# Altium PCB SC8808_V4.PcbDoc (part 1 of 2)
Units mm, origin at the board's own origin, x right, y up, seen from the top; angles counter-clockwise.
Board outline 67.41 x 100 mm, 4 copper layers (Top Layer, SIGNAL, POWER, Bottom Layer), stack 1.439 mm thick; 136 components, 98 nets, 352 pads, 959 vias.
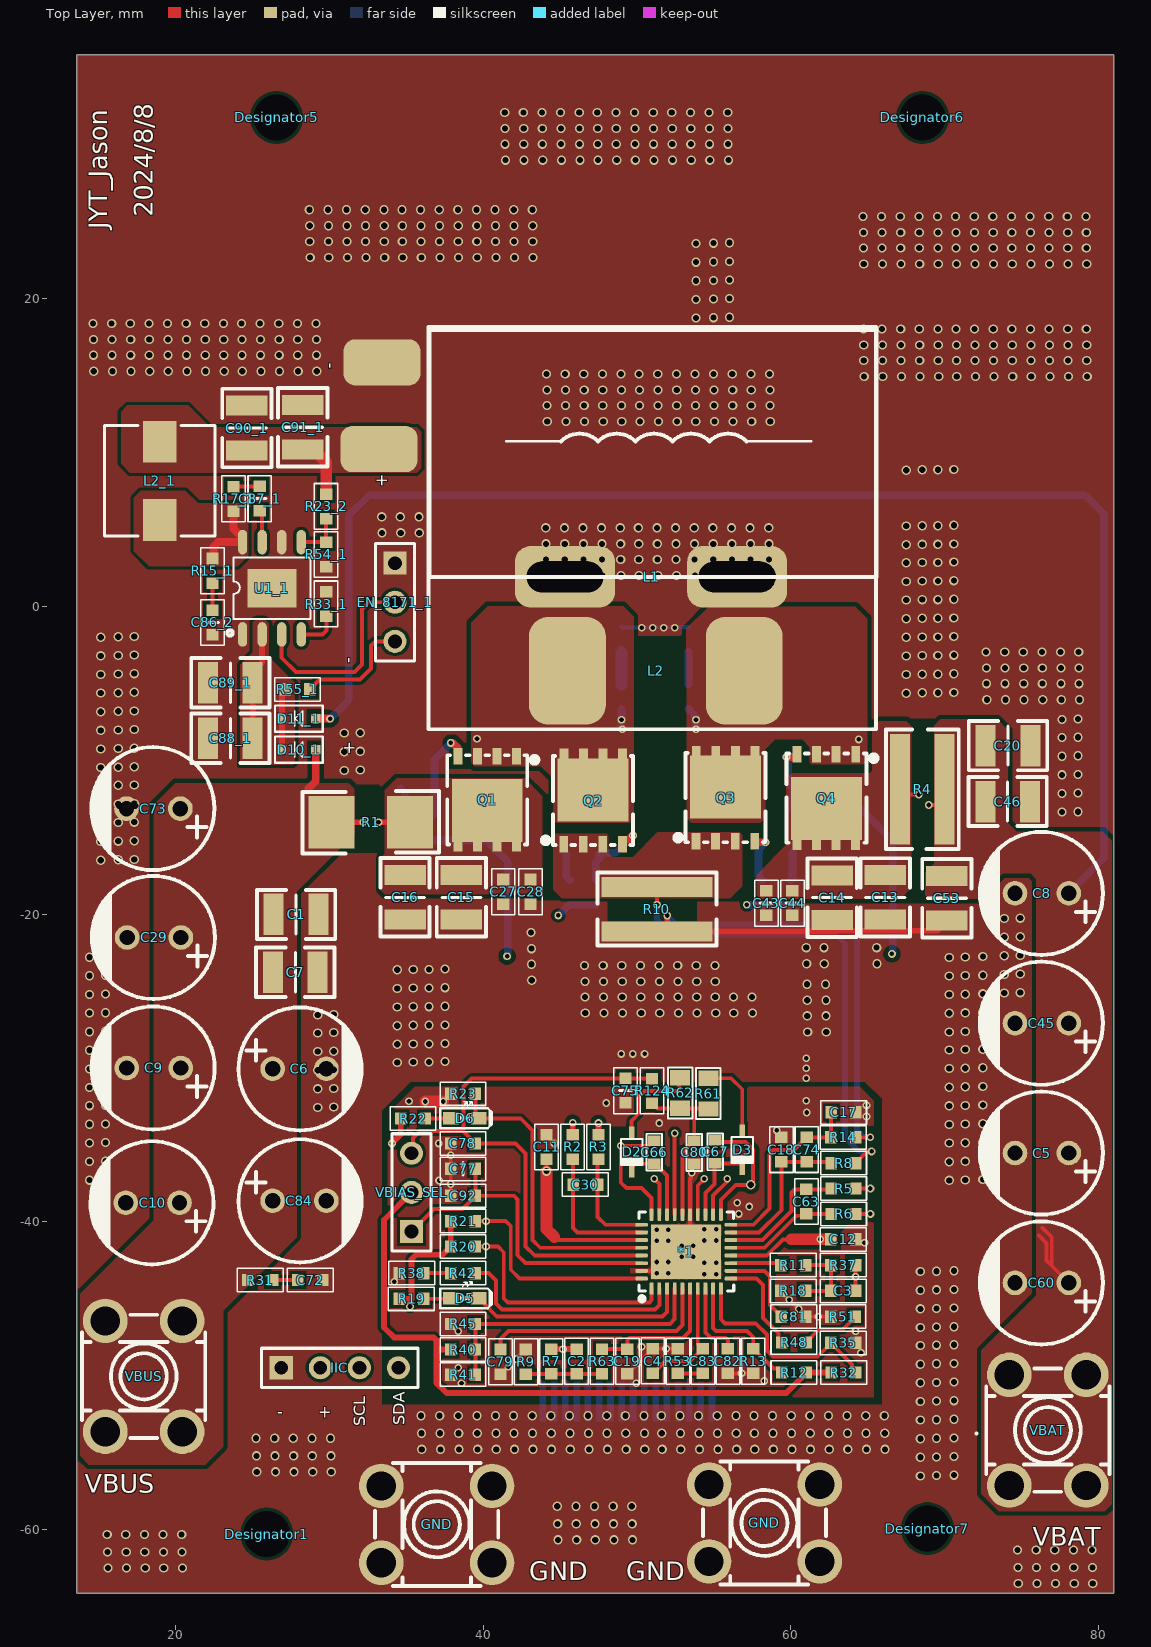
[diagram p0: Top Layer view]
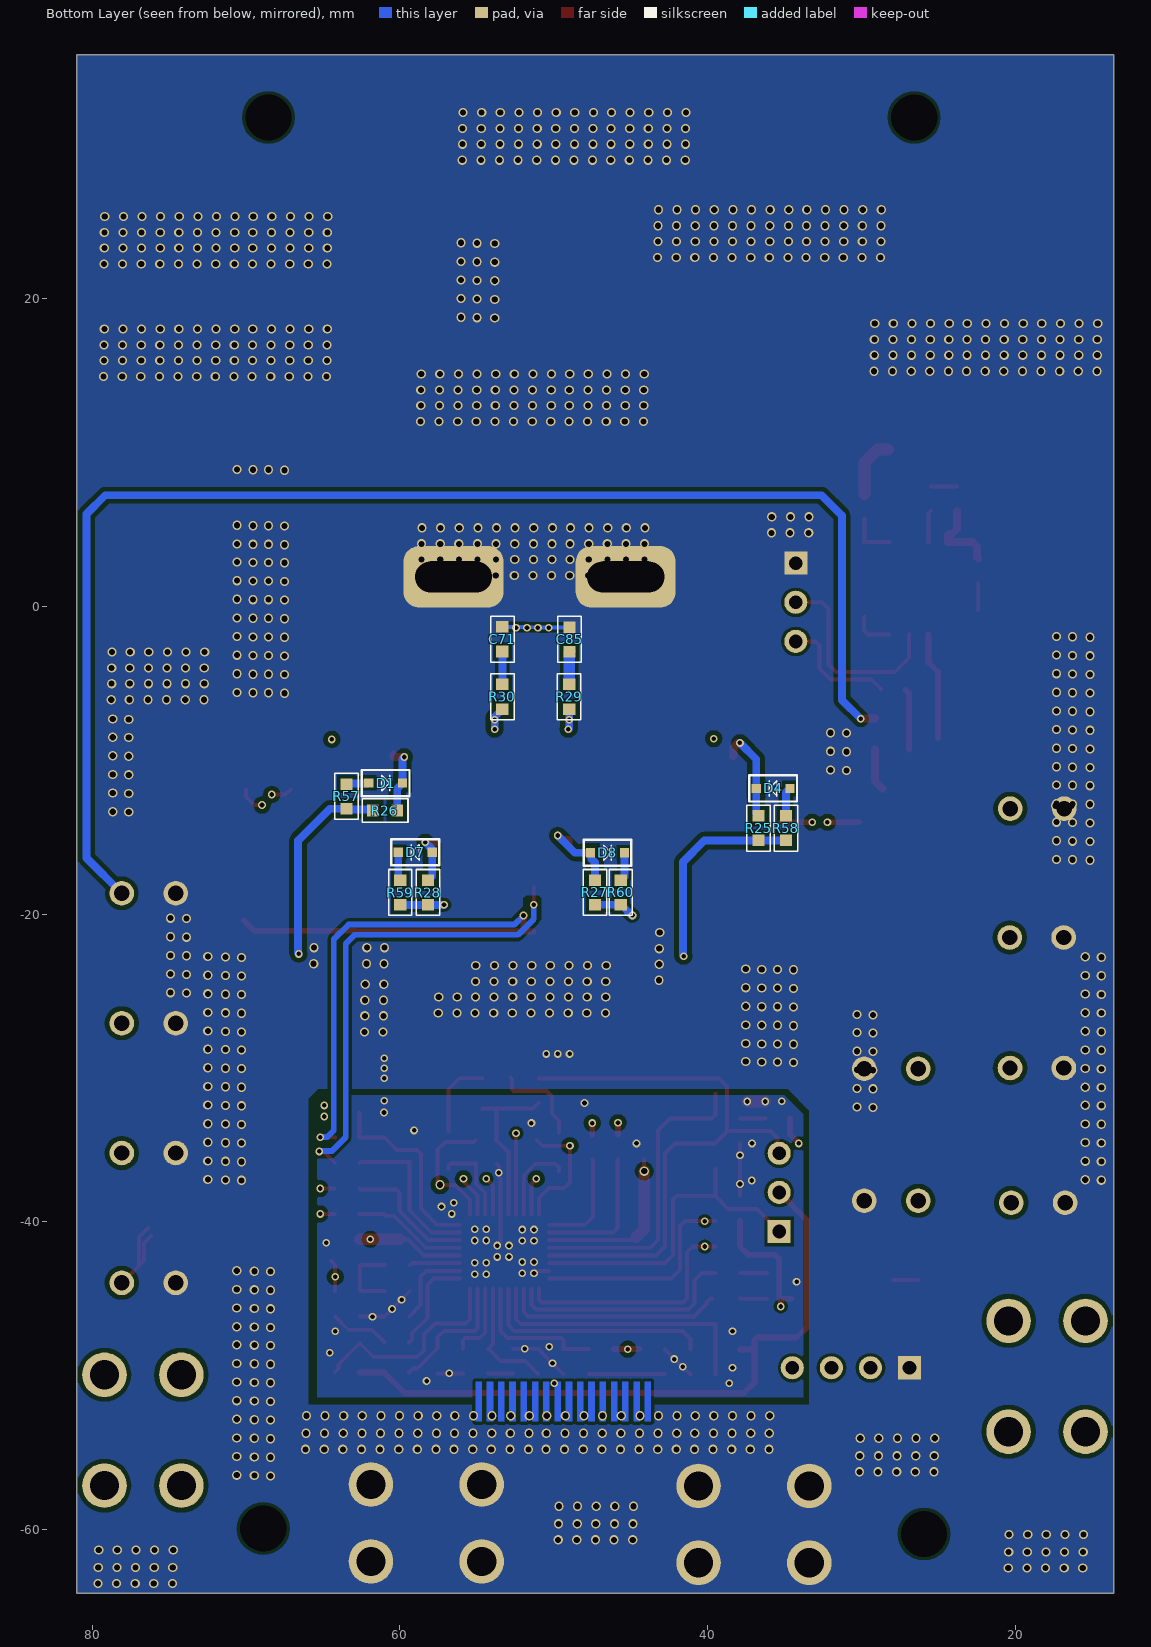
[diagram p1: Bottom Layer view, seen from below]
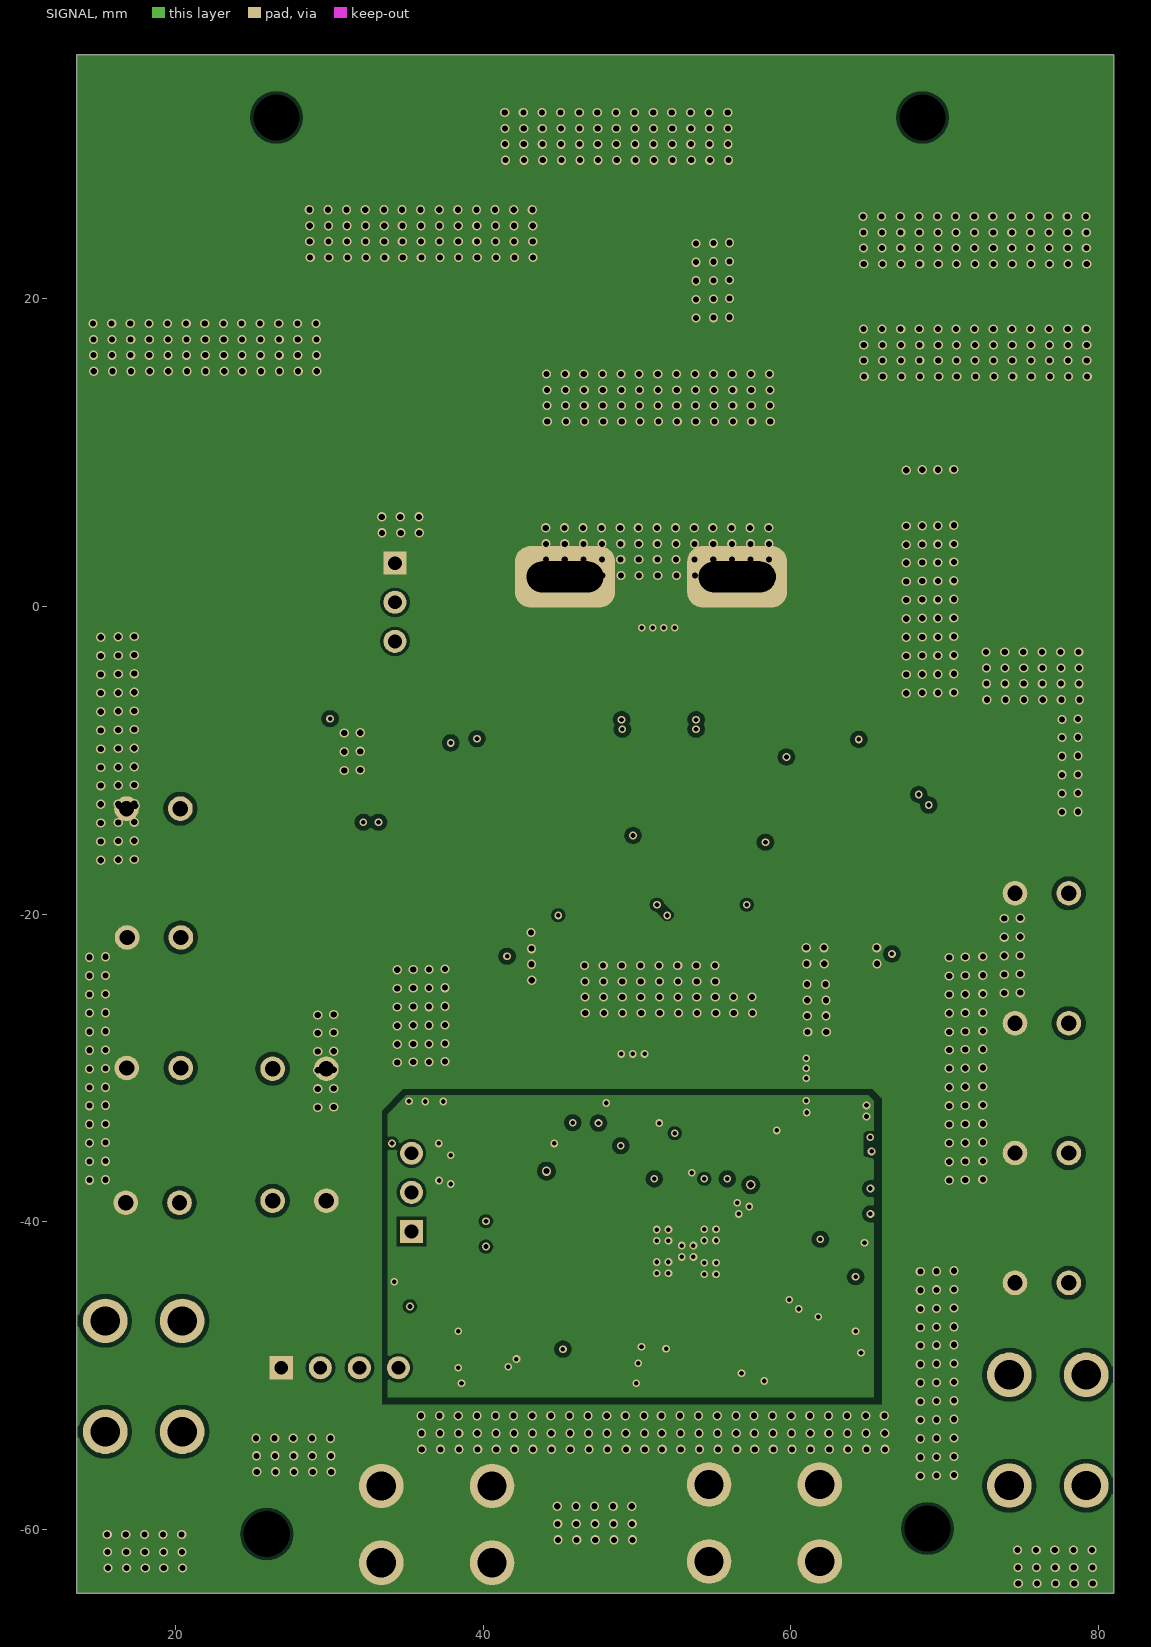
[diagram p2: SIGNAL]
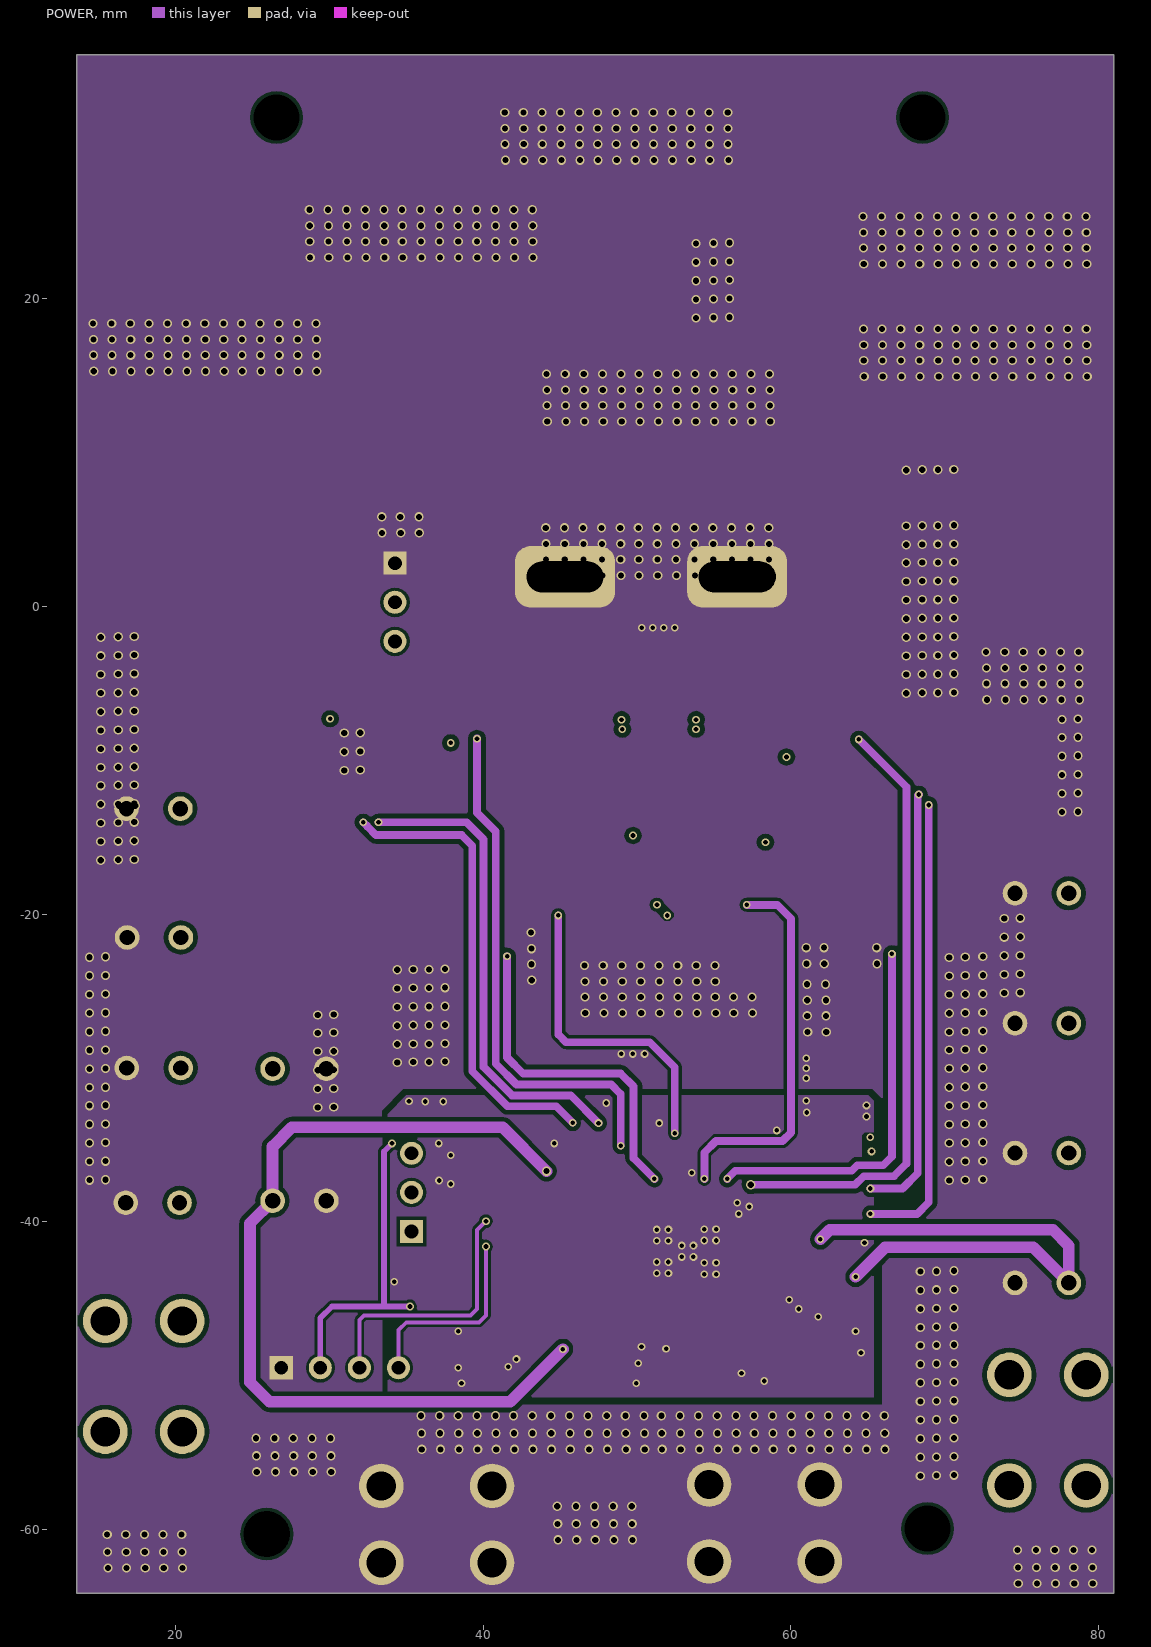
[diagram p3: POWER]

## Layer stack, top to bottom
Top Solder: solder mask 0.0254, SM-001, Dk 4
Top Layer: signal copper 0.07
Dielectric 4: prepreg 0.1295, PP-017, Dk 4.3
Dielectric 2: prepreg 0.1295, PP-017, Dk 4.3
SIGNAL: signal copper 0.035
Dielectric 1: core 0.7112, Core-039, Dk 4.8
POWER: signal copper 0.035
Dielectric 3: prepreg 0.1295, PP-017, Dk 4.3
Dielectric 5: prepreg 0.1295, PP-017, Dk 4.3
Bottom Layer: signal copper 0.07
Bottom Solder: solder mask 0.0254, SM-001, Dk 4

## Board outline
13.589,-64.135 13.589,35.865 81.001,35.865 81.001,-64.135

## Design rules (kind name [scope] priority, off if disabled: settings)
Clearance Polygon_HV_NET [InPolygon vs InNetClass('HV_NET')] p1: gap=0.3 ignorepadtopadclearanceinfootprint=FALSE
Clearance Polygon_PWR [InPolygon vs InNetClass('PWR_NOT_GND')] p2: gap=0.2 ignorepadtopadclearanceinfootprint=FALSE
Clearance [All] p3: gap=0.2 ignorepadtopadclearanceinfootprint=FALSE
HoleSize [All] p1: absolutevalues=TRUE maxlimit=10 minlimit=0.025 maxpercent=80.000 minpercent=20.000
MinimumSolderMaskSliver [All] p1: minsoldermaskwidth=0.152
PlaneConnect PlaneConnect_power [InNetClass('PWR_IN_OUT')] p1: planeconnectstyle=Direct reliefexpansion=0.508 reliefentries=4 reliefconductorwidth=0.254 reliefairgap=0.254
PlaneConnect PlaneConnect_1 [All] p2: planeconnectstyle=Relief reliefexpansion=0.508 reliefentries=4 reliefconductorwidth=0.254 reliefairgap=0.254
PolygonConnect PolygonConnect_power [InNetClass('PWR_IN_OUT')] p1: connectstyle=Direct reliefconductorwidth=0.254 reliefentries=4 polygonreliefangle="90 Angle" airgapwidth=0.254
PolygonConnect PolygonConnect_1 [All] p2: connectstyle=Direct reliefconductorwidth=0.254 reliefentries=4 polygonreliefangle="90 Angle" airgapwidth=0.254
RoutingLayers [InNet('GND')] p1: top layer_v5=FALSE mid layer 1_v5=TRUE mid layer 2_v5=TRUE bottom layer_v5=FALSE
RoutingVias [All] p1: holewidth=0.3 width=0.5 viastyle="Through Hole" minholewidth=0.3 minwidth=0.5 maxholewidth=0.3 maxwidth=1.27
SolderMaskExpansion [All] p1: expansion=0.102 istentingtop=FALSE
Width [All] p1: maxlimit=1.27 minlimit=0.2 preferedwidth=0.762
26 further rules are at their usual default settings.

## Classes and differential pairs
net class HV_NET: BT EN HD1 HD2 Net*1_21 Net*1_26 NetEN_8171_3 SNS1N SNS1P SNS2N SNS2P snub_vout SW SW1 SW2 VBAT VBUS Vg_Q1 Vg_Q2 Vg_Q3 Vg_Q4 VIN_8171 VMID
net class PWR_NOT_GND: EN NetEN_8171_3 snub_gnd snub_vout SW1 SW2 VBAT VBUS VIN_8171 VMID
net class PWR_IN_OUT: GND snub_gnd snub_vout SW SW1 SW2 VBAT VBUS VIN_8171 VMID
component class "SC8808_EVM _V04": C1 C2 C4 C7 C11 C12 C13 C14 C15 C16 C17 C18 C19 C27 C28 C30 C43 C44 C46 C53 C63 C66 C67 C71 C72 C74 C75 C77 C78 C79 C80 C81 C82 C83 C85 C92 D1 D2 D3 D4 D5 D6 D7 D8 IIC Q1 Q2 Q3 R1 R2 R3 R4 R5 R6 R7 R8 R9 R10 R11 R12 R13 R14 R18 R19 R20 R21 R22 R25 R26 R27 R28 R29 R30 R31 R32 R35 R38 R40 R41 R42 R45 R48 R51 R53 R57 R58 R59 R60 R61 R62 R63

## Components (designator, comment, footprint, x,y, rotation, side; value= is the part's Value field where it differs from the comment)
*1 "SC8808" QFN-36-5X6 50.952,-44.336 r90 top
C1 "4.7uF/100V" C_1210 26.439,-20.015 r0 top
C2 "1nF/100V" R_0603 46.076,-48.222 r270 top
C3 "NC" R_0603 62.56,-44.488 r0 top
C4 "NC" R_0603 51.029,-48.196 r270 top
C5 "CAP-TH_BD8.0-P3.50-D0.6-FD" CAP-TH_BD8.0-P3.50-D0.6-FD 76.327,-35.526 r180 top
C6 "CAP-TH_BD8.0-P3.50-D0.6-FD" CAP-TH_BD8.0-P3.50-D0.6-FD 28.06,-30.052 r0 top
C7 "4.7uF/100V" C_1210 29.185,-23.774 r180 top
C8 "CAP-TH_BD8.0-P3.50-D0.6-FD" CAP-TH_BD8.0-P3.50-D0.6-FD 76.327,-18.644 r180 top
C9 "CAP-TH_BD8.0-P3.50-D0.6-FD" CAP-TH_BD8.0-P3.50-D0.6-FD 18.586,-29.997 r180 top
C10 "CAP-TH_BD8.0-P3.50-D0.6-FD" CAP-TH_BD8.0-P3.50-D0.6-FD 18.509,-38.76 r180 top
C11 "100nF/100V" R_0603 44.12,-35.979 r90 top
C12 "100nF/100V" R_0603 64.262,-41.135 r180 top
C13 "4.7uF/100V" C_1210 66.142,-20.307 r90 top
C14 "4.7uF/100V" C_1210 62.687,-20.32 r90 top
C15 "4.7uF/100V" C_1210 38.583,-20.297 r90 top
C16 "4.7uF/100V" C_1210 34.925,-20.297 r90 top
C17 "NC" R_0603 62.586,-32.88 r0 top
C18 "NC" R_0603 59.385,-34.455 r270 top
C19 "1nF/100V" R_0603 49.378,-48.222 r270 top
C20 "4.7uF/100V" C_1210 75.516,-9.042 r180 top (schematic designator C13)
C27 "100nF/100V" R_0603 41.307,-19.394 r90 top
C28 "10nF/100V" R_0603 43.08,-19.394 r90 top
C29 "CAP-TH_BD8.0-P3.50-D0.6-FD" CAP-TH_BD8.0-P3.50-D0.6-FD 18.602,-21.513 r180 top
C30 "10uF" R_0603 45.796,-37.579 r0 top
C43 "100nF/100V" C_0603 58.414,-20.041 r90 top
C44 "10nF/100V" C_0603 60.104,-20.041 r90 top
C45 "CAP-TH_BD8.0-P3.50-D0.6-FD" CAP-TH_BD8.0-P3.50-D0.6-FD 76.327,-27.085 r180 top
C46 "4.7uF/100V" C_1210 72.695,-12.675 r0 top
C53 "4.7uF/100V" C_1210 70.146,-20.36 r90 top
C60 "CAP-TH_BD8.0-P3.50-D0.6-FD" CAP-TH_BD8.0-P3.50-D0.6-FD 76.327,-43.967 r180 top
C63 "10uF" R_0603 61.011,-37.833 r270 top
C66 "330nF/50V" 0603 51.13,-35.471 r0 top
C67 "330nF/50V" 0603 55.093,-35.446 r0 top
C71 "NC" R_0603 53.34,-1.27 r270 bottom
C72 "100nF/100V" R_0603 29.609,-43.782 r180 top
C73 "CAP-TH_BD8.0-P3.50-D0.6-FD" CAP-TH_BD8.0-P3.50-D0.6-FD 18.567,-13.132 r180 top
C74 "33nF" R_0603 61.036,-34.455 r270 top
C75 "1uF" C_0603 49.251,-32.233 r90 top
C77 "1uF" C_0603 37.935,-36.551 r0 top
C78 "4.7uF" R_0603 39.536,-34.9 r180 top
C79 "10nF" R_0603 41.123,-49.949 r90 top
C80 "4.7uF" 0603 53.721,-35.483 r0 top
C81 "10nF" R_0603 61.036,-46.164 r180 top
C82 "10nF" R_0603 55.905,-49.898 r90 top
C83 "10nF" R_0603 54.28,-49.898 r90 top
C84 "CAP-TH_BD8.0-P3.50-D0.6-FD" CAP-TH_BD8.0-P3.50-D0.6-FD 28.06,-38.633 r0 top
C85 "NC" R_0603 48.971,-1.279 r270 bottom
C86_2 "NC" C_0603 22.403,-1.791 r90 top (schematic designator C86)
C87_1 "100nF" C_0603 25.476,6.261 r90 top (schematic designator C87)
C88_1 "2.2uF/100V" C_1210 22.174,-8.56 r0 top (schematic designator C88)
C89_1 "100nF/100V" C_1210 22.174,-4.953 r0 top (schematic designator C89)
C90_1 "4.7uF" C_1210 24.638,13.005 r270 top (schematic designator C90)
C91_1 "4.7uF" C_1210 28.27,13.056 r270 top (schematic designator C91)
C92 "4.7uF" R_0603 37.846,-38.303 r0 top
D1 "BAS316" SOD323F 60.926,-11.478 r0 bottom
D2 "BAS316" SOD-323 49.651,-35.452 r270 top
D3 "BAS316" SOD-323 56.845,-35.319 r270 top
D4 "BAS316" SOD323F 35.74,-11.82 r180 bottom
D5 "BLUE-LED" LED0603\TT 38.583,-44.983 r0 top
D6 "BLUE-LED" LED0603\TT 38.583,-33.274 r0 top
D7 "BAS316" SOD323F 59.004,-15.977 r180 bottom
D8 "BAS316" SOD323F 46.507,-16.002 r0 bottom
D10_1 "B110WS" SOD323F 28.016,-9.296 r0 top (schematic designator D10)
D11_1 "B110WS" SOD323F 28.016,-7.284 r0 top (schematic designator D11)
Designator1 "Comment" 定位固定孔 25.933,-60.3 r90 top locked
Designator5 "Comment" 定位固定孔 26.568,31.801 r90 top
Designator6 "Comment" 定位固定孔 68.555,31.801 r90 top
Designator7 "Comment" 定位固定孔 68.885,-59.944 r90 top
EN_8171_1 "Header 3" HDR1X3 34.265,2.819 r270 top (schematic designator EN_8171)
GND "JACK" 焊接端子 58.286,-59.574 r90 top
GND "JACK" 焊接端子 36.982,-59.665 r270 top
IIC "Header 4" HDR1X4 26.873,-49.486 r0 top
L1 "Comment" PCBComponent_1 65.513,1.981 r0 top
L2 "Comment" L_扁平电感_28x27 45.472,-4.166 r0 top locked
L2_1 "68uH" WE-HCI_7040 18.974,8.179 r180 top (schematic designator L2)
Q1 "NMOS_5X6" NMOS_5X6 42.158,-9.738 r180 top
Q2 "NMOS_5X6" NMOS_5X6 45.249,-15.427 r0 top
Q3 "NMOS_5X6" NMOS_5X6 53.859,-15.249 r0 top
Q4 "NMOS_5X6" NMOS_5X6 64.211,-9.627 r180 top
R1 "2mR" RES2512-SMD_L6.4-W3.2-A 32.69,-14.021 r0 top
R2 "1R5" R_0603 45.822,-35.979 r90 top
R3 "1R5" R_0603 47.498,-35.979 r90 top
R4 "5mR" R1225 68.529,-11.887 r0 top
R5 "3R3" R_0603 62.586,-37.833 r0 top
R6 "3R3" R_0603 62.586,-39.484 r0 top
R7 "200k" R_0603 44.425,-49.924 r90 top
R8 "1R" R_0603 62.586,-36.182 r0 top
R9 "9.1k" R_0603 42.774,-48.247 r270 top
R10 "3mR" R1225 51.308,-19.685 r90 top
R11 "0R" R_0603 61.011,-42.812 r180 top
R12 "150k" R_0603 59.36,-49.797 r0 top
R13 "27k" R_0603 57.556,-49.898 r90 top
R14 "1R" R_0603 62.56,-34.506 r0 top
R15_1 "NC" R_0603 22.403,1.473 r90 top (schematic designator R15)
R17_1 "62R" R_0603 23.774,7.849 r270 top (schematic designator R17)
R18 "10k" R_0603 61.011,-44.488 r180 top
R19 "10k" R_0603 34.493,-45.001 r0 top
R20 "10k" R_0603 37.846,-41.605 r0 top
R21 "10k" R_0603 37.846,-39.954 r0 top
R22 "10k" R_0603 34.595,-33.282 r0 top
R23 "10k" R_0603 37.846,-31.674 r0 top (schematic designator R20)
R23_2 "510k" R_0603 29.794,5.664 r90 top (schematic designator R23)
R25 "5R1" R_0603 36.683,-15.249 r90 bottom
R26 "5R1" R_0603 60.122,-13.259 r0 bottom
R27 "5R1" R_0603 47.32,-19.431 r90 bottom
R28 "5R1" R_0603 58.176,-17.742 r270 bottom
R29 "NC" R_0603 48.997,-5.013 r270 bottom
R30 "NC" R_0603 53.34,-5.013 r270 bottom
R31 "100k" R_0603 26.361,-43.782 r180 top
R32 "200k" R_0603 64.287,-49.797 r180 top
R33_1 "100k" R_0603 29.794,1.016 r270 top (schematic designator R33)
R35 "47k" R_0603 64.262,-47.866 r180 top
R37 "300k" R_0603 64.262,-42.812 r180 top
R38 "110k" R_0603 36.195,-43.332 r180 top
R40 "10k" R_0603 37.846,-48.298 r0 top
R41 "NC" R_0603 37.846,-49.935 r0 top
R42 "0R" R_0603 39.536,-43.332 r180 top
R45 "10k" R_0603 37.846,-46.634 r0 top
R48 "0R" R_0603 59.36,-47.841 r0 top
R51 "200k" R_0603 64.237,-46.164 r180 top
R53 "10k" R_0603 52.654,-49.898 r90 top
R54_1 "68k" R_0603 29.794,2.54 r90 top (schematic designator R54)
R55_1 "1M" R_0603 28.777,-5.385 r180 top (schematic designator R55)
R57 "0R" R_0603 63.477,-11.489 r270 bottom
R58 "0R" R_0603 34.902,-15.249 r90 bottom
R59 "0R" R_0603 59.979,-17.742 r270 bottom
R60 "0R" R_0603 45.644,-19.431 r90 bottom
R61 "0R" 0805 54.635,-31.661 r90 top
R62 "0R" 0805 52.807,-31.62 r90 top
R63 "3k" R_0603 47.727,-48.222 r270 top
R124 "0R" R_0603 50.978,-30.632 r270 top (schematic designator C78)
U1_1 "SC8171" SC817X 26.268,1.188 r90 top (schematic designator U1)
VBAT "JACK" 焊接端子 76.708,-53.543 r0 top
VBIAS_SEL "Header 3" HDR1X3 35.344,-40.622 r90 top
VBUS "JACK" 焊接端子 17.932,-50.038 r180 top

## Footprints (in the part's own frame and the unit in brackets; to place one, negate y for a bottom-side part, rotate by r counter-clockwise, add the part's x,y. Pads: shape width x height; smd on the part's side, far side on the other; paste and mask are expansions set on the pad)
0603 [mm]
  rect 0.8x0.7 smd: 1(0,0.75) 2(0,-0.75)
  silkscreen extent -0.5,-1.2 0.5,1.2
0805 [mm]
  rect 1x1.3 smd: 1(-1,0) 2(1,0)
  silkscreen extent -1.65,-0.8 1.65,0.8
C_0603 [mm]
  rect 0.75x0.8 smd: 1(-0.038,0) 2(1.562,0)
  silkscreen extent -0.74,-0.76 2.25,0.76, body extent -0.16,-0.47 1.59,0.47, height 0.85
C_1210 [mm]
  rect 1.3x2.7 smd: 1(-0.053,0) 2(2.847,0)
  silkscreen extent -1.15,-1.6 3.95,1.6, body extent -0.28,-1.37 3.12,1.32, height 1.35
CAP-TH_BD8.0-P3.50-D0.6-FD [mm]
  round 1.6 hole 1: 1(-1.75,0) 2(1.75,0)
  silkscreen extent -3.96,-4 4.04,4
HDR1X3 [mm]
  rect 1.5x1.5 hole 0.9: 1(0,0)
  round 1.5 hole 0.9: 2(2.54,0) 3(5.08,0)
  silkscreen extent -1.27,-1.27 6.35,1.27, body extent -1.24,-1.3 6.38,1.24, height 8.38
HDR1X4 [mm] "Connector; Header; 4 Position"
  rect 1.5x1.5 hole 0.9: 1(0,0)
  round 1.5 hole 0.9: 2(2.54,0) 3(5.08,0) 4(7.62,0)
  silkscreen extent -1.27,-1.27 8.89,1.27, body extent -1.27,-1.27 8.89,1.27, height 9.5
L_扁平电感_28x27 [mm]
  rrect50% 5x7 smd: 0(0,0) 0(11.5,0)
  silkscreen extent -9.02,-3.81 20.07,22.35
LED0603\TT [mm]
  rect 1x0.8 smd: 1(-0.68,0.013) 2(1.12,0.013)
  silkscreen extent -1.38,-0.64 2,1.09, body extent -0.64,-0.41 0.94,0.41, height 0.26
NMOS_5X6 [mm]
  rect 0.58x1.079 smd: 1(-0.011,-0.016) 2(1.259,-0.016) 3(2.529,-0.016) 4(3.799,-0.016)
  rect 0.58x1.08 smd: 5(3.804,5.653) 6(2.534,5.653) 7(1.264,5.653) 8(-0.006,5.653)
  rect 4.6x4.1 smd: 8(1.894,3.514)
  silkscreen extent -1.31,-0.08 4.49,5.72, body extent -0.57,-0.26 4.43,5.84, height 1.11
PCBComponent_1 [mm]
  rrect50% 6.5x4 hole 2 slot 5 at 0 deg: 0(-20.193,-0.051) 0(-8.998,-0.051)
  silkscreen extent -29.01,-0.05 0.08,16
QFN-36-5X6 [mm]
  rrect50% 0.8x0.25 smd paste+0: 1(0,0)
  rrect50% 0.8x0.25 smd: 2(0,-0.5) 3(0,-1) 4(0,-1.5) 5(0,-2) 6(0,-2.5) 7(0,-3) 8(0,-3.5) 9(0,-4) 10(0,-4.5) 19(4.8,-4.5) 20(4.8,-4) 21(4.8,-3.5) 22(4.8,-3) 23(4.8,-2.5) 24(4.8,-2) 25(4.8,-1.5) 26(4.8,-1) 27(4.8,-0.5) 28(4.8,0)
  rrect50% 0.25x0.8 smd: 11(0.65,-5.15) 12(1.15,-5.15) 13(1.65,-5.15) 14(2.15,-5.15) 15(2.65,-5.15) 16(3.15,-5.15) 17(3.65,-5.15) 18(4.15,-5.15) 29(4.15,0.65) 30(3.65,0.65) 31(3.15,0.65) 32(2.65,0.65) 33(2.15,0.65) 34(1.65,0.65) 35(1.15,0.65) 36(0.65,0.65)
  rect 3.55x4.55 smd: 37(2.4,-2.25)
  silkscreen extent -0.82,-5.34 4.97,0.81, body extent -0.11,-5.26 4.89,0.74, height 0.75
R1225 [mm]
  rect 1.3x7.2 smd paste+0 mask+0.05: 1(-1.433,0.008) 2(1.467,0.008)
  silkscreen extent -2.34,-3.86 2.39,3.89, body extent -1.7,-3.25 1.7,3.25, height 0.9
R_0603 [mm]
  rect 0.75x0.8 smd: 1(0.051,0) 2(1.651,0)
  silkscreen extent -0.65,-0.76 2.34,0.76, body extent -0.01,-0.5 1.74,0.45, height 0.85
RES2512-SMD_L6.4-W3.2-A [mm]
  rect 3x3.4 smd: 1(-2.55,0) 2(2.55,0)
  silkscreen extent -4.44,-2.03 4.44,2.03, body extent -3.48,-1.57 3.48,1.6, height 0.9
SC817X [mm]
  oval 1.598x0.6 smd: 1(-3,1.905) 2(-3,0.635) 3(-3,-0.635) 4(-3,-1.905) 5(3,-1.905) 6(3,-0.635) 7(3,0.635) 8(3,1.905)
  rect 2.5x3.2 smd: 9(0,0)
  silkscreen extent -3.07,-2.5 2,2.9, body extent -2.92,-2.41 3.06,2.49, height 1.55
SOD323F [mm]
  rect 0.6x0.6 smd paste-0.05 mask+0.05: 1(1.1,0) 2(-1.1,0)
  silkscreen extent -1.55,-0.85 1.55,0.85, body extent -1.3,-0.67 1.3,0.68, height 1.1
SOD-323 [mm]
  rect 0.8x0.35 smd paste-0.05: 1(-1.25,0) 2(1.25,0)
  silkscreen extent -0.85,-0.7 0.85,0.7
WE-HCI_7040 [mm] "SMT Flat Wire High Current Inductor, body 6.9x6.9mm"
  rect 2.2x2.7 smd: 1(0,2.55) 2(0,-2.55)
  silkscreen extent -3.6,-3.6 3.6,3.6, body extent -3.45,-3.5 3.45,3.5, height 4
定位固定孔 [mil]
  round 60 hole 118.11: 2(0,0)
  body extent -145,-130 146,130, height 106
焊接端子 [mm]
  round 2.9 hole 1.9: 1(-2.5,3.6) 1(-2.5,-3.6) 1(2.5,3.6) 1(2.5,-3.6)
  silkscreen extent -4,-4 4,4

## Part data
C1 C7 C13 C14 C15 C16 C20 C27 C28 C43 C44 C46 C53 C72 C88_1 C89_1 C90_1 C91_1: library part Cap_1210, "Capacitor"
  C88_1 C89_1 C90_1 C91_1: LatestRevisionDate=17-Jul-2002, LatestRevisionNote="Re-released for DXP Platform.", PackageDescription="Radial Cap, Thru-Hole; 2 Leads; 0.3 in Pin Spacing", PackageReference=RAD-0.3, Published=8-Jun-2000, Publisher="Altium Limited"
C2 C3 C4 C11 C12 C17 C18 C19 C30 C63 C66 C67 C74 C75 C77 C78 C79 C80 C81 C82 C83 C86_2 C87_1 C92 R124: library part Cap_0603, "Capacitor"
  C86_2 C87_1: LatestRevisionDate=17-Jul-2002, LatestRevisionNote="Re-released for DXP Platform.", PackageDescription="Radial Cap, Thru-Hole; 2 Leads; 0.3 in Pin Spacing", PackageReference=RAD-0.3, Published=8-Jun-2000, Publisher="Altium Limited"
C71 C85: library part Cap_1206, "Capacitor"
D1 D2 D3 D4 D7 D8 D10_1 D11_1: library part Diode, "Diode"
D5 D6: "Blue-LED"
EN_8171_1 VBIAS_SEL: "Header, 3-Pin"
  EN_8171_1: LatestRevisionDate=17-Jul-2002, LatestRevisionNote="Re-released for DXP Platform.", Publisher="Altium Limited"
GND GND VBAT VBUS: "Jack"
IIC: "Header, 4-Pin"
L2_1: library part 7447714680, "WE-PD SMT Power Inductor, size 1050P, 68uH, 1.9A, 110mOhm", DC Resistance max.=132mOhm, DC Resistance typ.=110mOhm, Manufacturer="Wurth Elektronik", Operating Temperature="-40 to +150degC", Rated Current=1.9A, Saturation Current=2.2A, Self Resonant Frequency=8MHz, ComponentLink1Description=Manufacturer, ComponentLink1URL=http://www.we-online.de, ComponentLink2Description=Datasheet, ComponentLink2URL=https://www.we-online.com/catalog/datasheet/7447714680.pdf, Inductance=68uH, Manufacturer Part Number=7447714680, Mounting Technology=SMT, Packaging="Tape and Reel", Published Date="August 2020", Size=1050P, Type=Performance
Q1 Q2 Q3 Q4: "TDM3740"
R1 R4 R29 R30: library part R_1206, "Resistor"
R2 R3 R5 R6 R7 R8 R9 R11 R12 R13 R14 R15_1 R17_1 R18 R19 R20 R21 R22 R23 R23_2 R25 R26 R27 R28 R32 R33_1 R35 R37 R38 R40 R41 R42 R45 R48 R51 R53 R54_1 R55_1 R57 R58 R59 R60 R63: library part R_0603, "Resistor"
  R15_1 R17_1 R23_2 R33_1 R54_1 R55_1: LatestRevisionDate=29-May-2009, LatestRevisionNote="IPC-7351 Footprint Added.", PackageDescription="Chip Resistor", PackageReference=J1-0603, Published=8-Jun-2000, Publisher="Altium Limited"
R10: library part R_2512, "Resistor"
R31 R61 R62: library part R_0805, "Resistor"
U1_1: library part SC817x

## Free pads (board coordinates)
  rrect50% 5x3 smd: 2(33.223,10.236) 2(33.426,15.875)

## Via types
v1: diameter 0.6, hole 0.4, Top Layer to Bottom Layer, 853 vias
v2: diameter 0.5, hole 0.3, Top Layer to Bottom Layer, 106 vias

## Nets (pads, with @x,y where several pads share a name; then routed paths per layer and width w, separated by ;. In a path a pad name is that pad's centre, name@x,y a point inside that pad or via, vN(x,y) a via of type N, cw(c..) or ccw(c..) an arc to the next point about the centre after c; other vN are vias at no path point)
1: C88_1.2 C89_1.2 D10_1.2 D11_1.2 R55_1.2 U1_1.2 | length 11
  Top Layer w0.381: C88_1.2@25.021,-8.56 C89_1.2@25.021,-4.953 25.021,-4.253 25.633,-3.641 U1_1.2@25.633,-1.812 ; D10_1.2@26.916,-9.296 26.916,-5.62 27.126,-5.41 R55_1.2@27.126,-5.385
2: 
3: L2_1.1 R15_1.2 R17_1.2 U1_1.8 | length 5.2
  Top Layer w0.508: R15_1.2@22.403,3.124 22.473,3.194 22.473,3.891 22.77,4.188 U1_1.8@24.363,4.188 24.363,4.662 24.32,4.705 24.13,4.705 23.774,5.061 R17_1.2@23.774,6.198
3V3: IIC.2 R19.1 R20.1 R21.1 R22.1 | length 30.1
  Top Layer w0.381: v2(34.074,-34.9) 34.074,-34.882 34.646,-34.31 R22.1@34.646,-33.282 ; R19.1@34.544,-45.001 35.242,-45.001 35.242,-45.444 v2(35.242,-45.499) ; 35.344,-45.001 35.344,-42.431 35.636,-42.139 37.364,-42.139 37.688,-41.815 R20.1@37.713,-41.815 ; R20.1@37.897,-41.605 R21.1@37.897,-39.954
  POWER w0.381: IIC.2@29.413,-49.486 29.413,-46.253 30.168,-45.499 33.553,-45.499 ; v2(34.074,-34.9) 33.553,-35.42 33.553,-45.499 ; v2(35.242,-45.499) 33.553,-45.499
4: C90_1.2 C91_1.2 L2_1.2 pad.2@33.223,10.236 R23_2.2 | length 3.9
  Top Layer w0.762: C91_1.2@28.27,10.209 28.97,10.209 29.794,9.385 R23_2.2@29.794,7.315
5: 
11: EN_8171_1.2 U1_1.3 | length 13.2
  Top Layer w0.254: U1_1.3@26.903,-1.812 26.903,-3.325 27.831,-4.253 31.637,-4.253 32.131,-3.759 32.131,-0.152 32.563,0.279 EN_8171_1.2@34.265,0.279
22: EN_8171_1.3 R55_1.1 | length 7.7
  Top Layer w0.254: R55_1.1@28.726,-5.385 28.726,-5.36 28.974,-5.112 28.999,-5.112 29.361,-4.75 32.004,-4.75 32.715,-4.039 32.715,-2.54 32.995,-2.261 EN_8171_1.3@34.265,-2.261
33: 
44: 
55: 
/CE: *1.32 D6.2 R23.2 | length 19.9
  Top Layer w0.254: R23.2@39.497,-31.674 39.497,-33.056 D6.2@39.703,-33.261 39.723,-33.282 42.443,-33.282 43.215,-34.053 43.215,-41.186 43.715,-41.686 *1.32@50.302,-41.686
BT: 
COMP: *1.7 C4.2 C83.2 | length 8
  Top Layer w0.254: C4.2@51.029,-49.847 51.054,-49.847 51.854,-49.047 53.455,-49.047 C83.2@54.255,-48.247 ; *1.7@53.952,-44.336 53.952,-47.945 C83.2@54.255,-48.247 ; C83.2@54.28,-48.247 C83.2@54.255,-48.247
CSN: *1.18 C17.1 C74.1 R14.1 | length 12.6
  Top Layer w0.254: *1.18@56.102,-40.186 57.582,-40.186 58.623,-39.144 58.623,-35.58 58.885,-35.319 60.198,-35.319 61.011,-34.506 C74.1@61.036,-34.506 R14.1@62.611,-34.506 62.624,-34.493 62.624,-32.893 C17.1@62.637,-32.88
CSP: *1.17 C18.2 C74.2 R8.1 | length 10.3
  Top Layer w0.254: *1.17@56.102,-40.686 57.943,-40.686 59.385,-39.243 C18.2@59.385,-36.106 C74.2@61.036,-36.106 62.56,-36.106 R8.1@62.637,-36.182
EN: 
EXT_VDRV: *1.24 C80.1 R61.1 R62.1 R124.2 | length 11.1
  Top Layer w0.254: R124.2@50.978,-32.283 51.003,-32.283 51.339,-32.62 R62.1@52.807,-32.62 53.7,-32.62 ; *1.24@52.952,-39.536 52.952,-35.452 53.671,-34.733 C80.1@53.721,-34.733 53.721,-32.64 53.7,-32.62 ; R61.1@54.635,-32.661 54.594,-32.62 53.7,-32.62
EXT_VDRV_SC8171: 
FB: 
FREQ: *1.2 R42.1 | length 15
  Top Layer w0.254: R42.1@39.485,-43.332 40.361,-43.332 40.843,-43.815 40.843,-45.304 41.234,-45.695 51.167,-45.695 51.452,-45.409 *1.2@51.452,-44.336
FREQ_100kHz: 
FREQ_200kHz: 
FREQ_345kHz: 
FREQ_480kHz: 